# EAGLE board OLM-env-sensor (EAGLE 6.4)
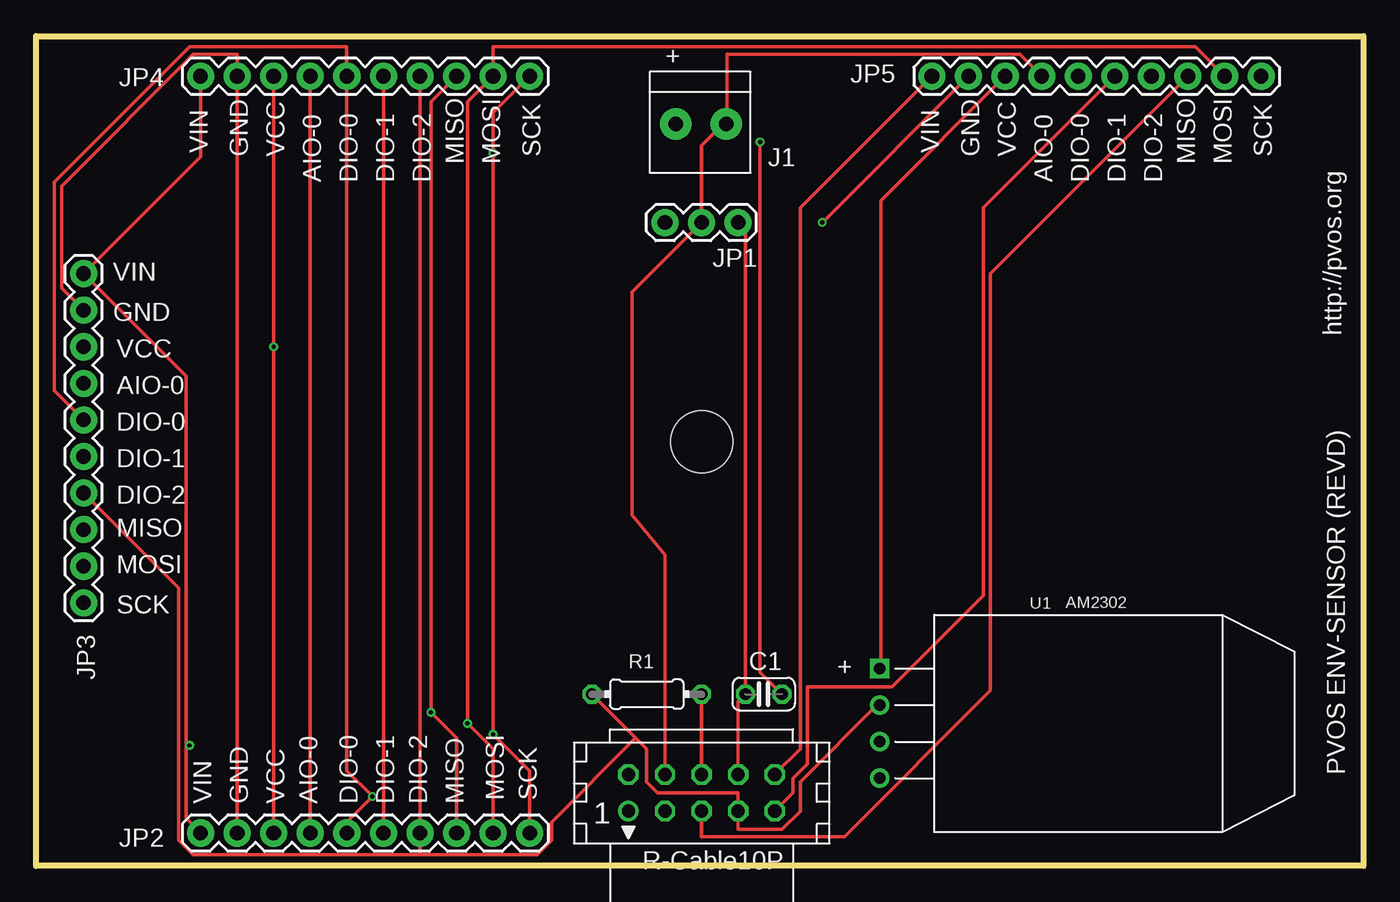
[diagram p0: board, top side]
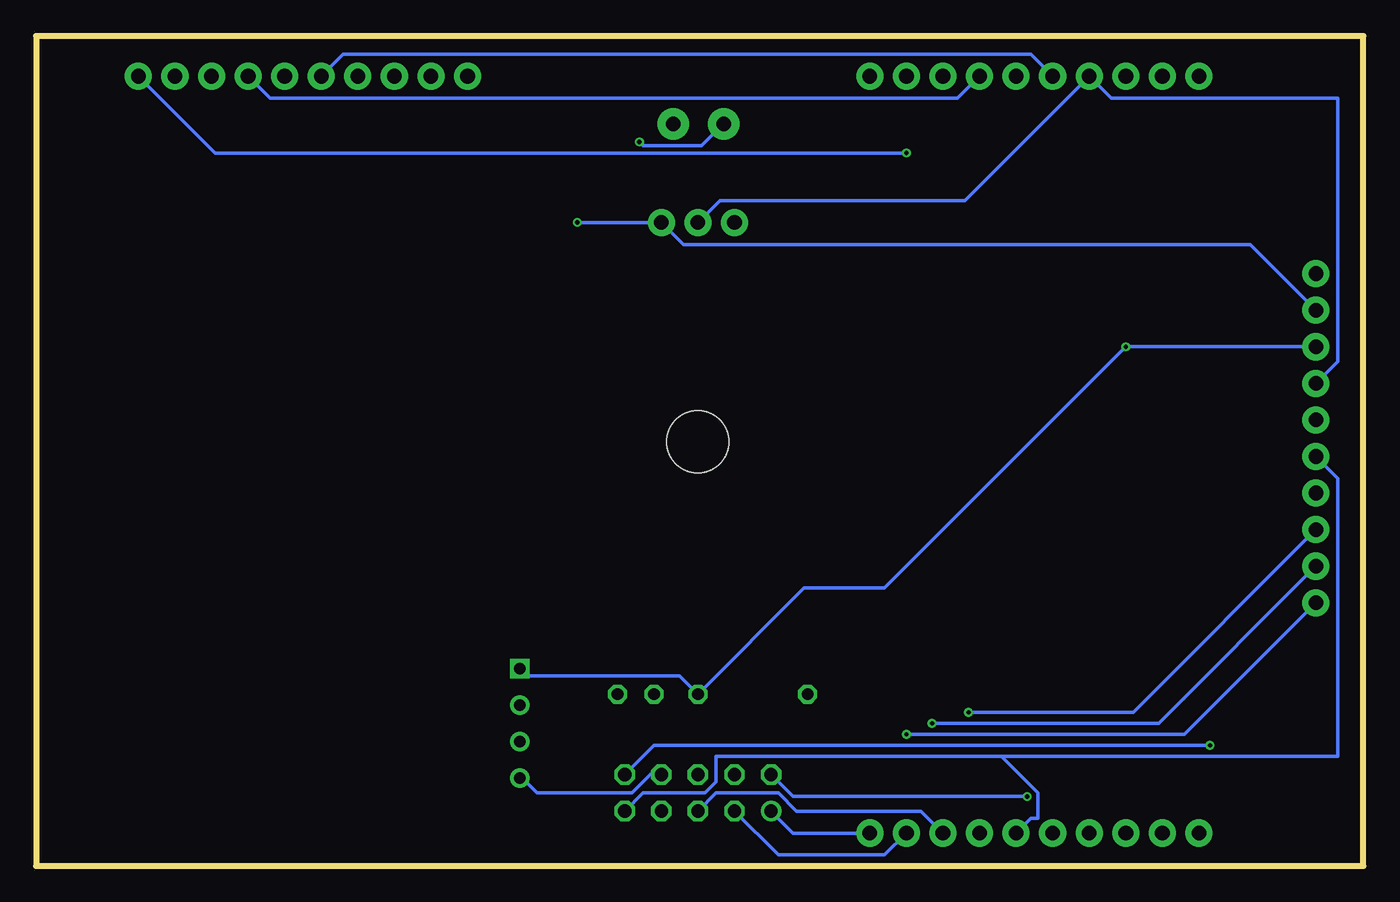
[diagram p1: board, bottom side, seen from below]

Size 92.2 x 57.66 mm. Coordinates in mm from the lower left corner, seen from the top.
Outline: 0,0 0,57.66 92.2,57.66 92.2,0 0,0
Copper layers (1*16): Top 0.035mm / dielectric 1.5mm / Bottom 0.035mm
Design rules "Fusion_eagle_rule_v1.1": minimum track width 6mil, minimum drill 12mil, track to track 6mil, track to pad 6mil, pad to pad 6mil, via to via 6mil, smd to smd 0mil, copper to edge 10mil, drill to drill 10mil, minimum pad ring 10mil, minimum via ring 6mil, stop-mask expansion 2mil, vias tented up to drill 100mil, thermal gap 10mil
Net classes: 0 default: width 0.254 mm, drill 0.254 mm, clearance 0.254 mm; 1 power: width 0.813 mm, drill 0.254 mm, clearance 0.254 mm
Holes 4.32 mm at 46.23,29.46

## Footprints (pad centres in the part's own frame; a part is rotated, then mirrored left to right if it is on the bottom)
C025-024X044 = drill 0.813 octagon: 1 -1.27,0; 2 1.27,0
CON10L = drill 0.914: 1 5.08,1.27 | drill 0.914 octagon: 2 5.08,-1.27; 3 2.54,1.27; 4 2.54,-1.27; 5 0,1.27; 6 0,-1.27; 7 -2.54,1.27; 8 -2.54,-1.27; 9 -5.08,1.27; 10 -5.08,-1.27
1X2-3.5MM = drill 1 pad 2.184: 1 1.8,0; 2 -1.7,0
1X03 = drill 1.016 pad 1.88: 1 0,0; 2 2.54,0; 3 5.08,0
1X10 = drill 1.016 pad 1.88: 1 0,0; 2 2.54,0; 3 5.08,0; 4 7.62,0; 5 10.16,0; 6 12.7,0; 7 15.24,0; 8 17.78,0; 9 20.32,0; 10 22.86,0
0204/7 = drill 0.813 octagon: 1 -3.81,0; 2 3.81,0
AM2302 = drill 0.8 pad 1.35 square: P$1 -3.81,-13.8 | drill 0.8 pad 1.35: P$2 -1.27,-13.8; P$3 1.27,-13.8; P$4 3.81,-13.8

## Placement (x,y rotation side)
C1  0.1µ  [C025-024X044]  50.55,11.94 180 top
CON1  [CON10L]  46.23,5.08 180 top
J1  1X2-3.5MM  [1X2-3.5MM]  46.23,51.56 180 top
JP1  [1X03]  48.77,44.7 180 top
JP2  M10"  [1X10]  11.43,2.29 0 top
JP3  M10"  [1X10]  3.3,41.15 270 top
JP4  M10"  [1X10]  11.43,54.86 0 top
JP5  M10"  [1X10]  62.23,54.86 0 top
R1  10k  [0204/7]  42.42,11.94 180 top
U1  AM2302  [AM2302]  72.39,9.91 270 top

## Library data of the parts
C1 = resistor
CON1 = con-harting; OC_FARNELL: unknown; OC_NEWARK: unknown
J1 = adafruit
JP1-JP5 = SparkFun-Connectors
R1 = rcl
U1 = sensor

## Nets
3.3V: C1.1 J1.1
AIO-0: CON1.4 J1.2 JP1.2 JP2.4 JP3.4 JP4.4 JP5.4
DIO-0: CON1.2 JP2.5 JP3.5 JP4.5 JP5.5
DIO-1: CON1.9 JP2.6 JP3.6 JP4.6 JP5.6
DIO-2: CON1.7 JP2.7 JP3.7 JP4.7 JP5.7 R1.2 U1.P$2
GND: C1.2 CON1.8 JP1.1 JP2.2 JP3.2 JP4.2 JP5.2 U1.P$4
MISO: CON1.5 JP2.8 JP3.8 JP4.8 JP5.8
MOSI: CON1.3 JP2.9 JP3.9 JP4.9 JP5.9
SCK: CON1.1 JP2.10 JP3.10 JP4.10 JP5.10
VCC: CON1.6 JP2.3 JP3.3 JP4.3 JP5.3 R1.1 U1.P$1
VIN: CON1.10 JP2.1 JP3.1 JP4.1 JP5.1

## Tracks (layer width: path | path; a pad name or v marks a point on that pad's centre or on a via)
3.3V  (via drill 0.3)
  Top 0.254: C1.1 50.29,13.46 v50.29,50.29
  Bottom 0.254: v50.29,50.29 50.04,50.04 45.97,50.04 44.45,51.56 J1.1
AIO-0
  Top 0.254: JP4.4 JP2.4 | JP5.4 68.33,56.39 48.01,56.39 48.01,51.56 J1.2 47.75,51.56 46.23,50.04 JP1.2 41.4,39.88 41.4,24.38 43.69,21.59 CON1.4
  Bottom 0.254: JP3.4 1.78,35.05 1.78,53.34 17.53,53.34 JP4.4 27.69,46.23 44.7,46.23 JP1.2
DIO-0  (via drill 0.3)
  Top 0.254: JP2.5 21.59,3.05 v23.37,4.83 21.59,6.6 JP4.5 21.59,56.9 10.67,56.9 1.27,47.5 1.27,33.02 JP3.5
  Bottom 0.254: CON1.2 39.62,4.83 v23.37,4.83 | JP5.5 70.87,56.39 23.11,56.39 JP4.5
DIO-1
  Top 0.254: JP2.6 JP4.6 | JP5.6 65.79,45.72 65.79,18.8 59.44,12.45 53.59,12.45 53.59,7.11 52.58,6.1 52.58,5.08 CON1.9
  Bottom 0.254: CON1.9 50.04,5.08 45.72,5.08 44.96,5.84 44.96,7.62 25.15,7.62 | 25.15,7.62 22.61,5.08 22.61,3.3 23.11,3.3 JP2.6 | JP3.6 1.78,26.92 1.78,7.62 25.15,7.62
DIO-2
  Top 0.254: 41.66,8.89 42.42,8.13 42.42,5.84 43.18,5.08 48.77,5.08 CON1.7 48.77,2.54 51.82,2.54 53.09,3.81 53.09,5.84 58.42,11.18 U1.P$2 | 41.66,8.89 R1.2 | JP3.7 9.91,19.3 9.91,1.78 10.92,0.76 26.67,0.76 | 26.67,0.76 JP2.7 JP4.7 | 41.66,8.89 35.81,3.05 35.81,1.78 34.8,0.76 26.67,0.76
  Bottom 0.254: JP5.7 75.95,53.34 28.19,53.34 JP4.7
GND  (via drill 0.3)
  Top 0.254: JP2.2 JP4.2 13.97,56.39 10.92,56.39 1.78,47.24 1.78,40.13 JP3.2 | CON1.8 48.77,11.43 C1.2 49.28,44.2 JP1.1 | v54.61,44.7 JP5.2
  Bottom 0.254: CON1.8 49.53,6.35 50.8,5.08 57.4,5.08 58.42,6.1 U1.P$4 | v54.61,44.7 JP1.1 47.24,43.18 7.87,43.18 JP3.2
MISO  (via drill 0.3)
  Top 0.254: JP2.8 29.21,8.89 v27.43,10.67 27.43,53.09 JP4.8 | JP5.8 66.29,41.15 66.29,12.19 56.13,2.03 46.23,2.03 CON1.5
  Bottom 0.254: CON1.5 44.96,5.08 40.64,5.08 39.37,3.81 30.73,3.81 JP2.8 | JP3.8 16,10.67 v27.43,10.67
MOSI  (via drill 0.3)
  Top 0.254: JP2.9 31.75,8.13 v29.97,9.91 29.97,53.09 JP4.9 31.75,56.9 80.52,56.9 JP5.9
  Bottom 0.254: CON1.3 40.64,0.76 33.27,0.76 JP2.9 | JP3.9 14.22,9.91 v29.97,9.91
SCK  (via drill 0.3)
  Top 0.254: JP2.10 34.29,6.6 v31.75,9.14 v31.75,49.53 31.75,52.32 JP4.10
  Bottom 0.254: CON1.1 39.62,2.29 JP2.10 | JP3.10 12.45,9.14 v31.75,9.14 | JP5.10 79.76,49.53 v31.75,49.53
VCC  (via drill 0.3)
  Top 0.254: JP4.3 v16.51,36.07 JP2.3 | CON1.6 R1.1 | JP5.3 58.67,46.23 58.67,13.72 U1.P$1
  Bottom 0.254: JP3.3 v16.51,36.07 33.27,19.3 38.86,19.3 R1.1 47.5,13.21 57.91,13.21 58.42,13.72 U1.P$1
VIN  (via drill 0.3)
  Top 0.254: CON1.10 53.09,8.13 53.09,45.72 JP5.1 | JP4.1 11.43,49.28 JP3.1 10.41,34.04 10.41,8.38 | JP2.1 10.41,3.3 10.41,8.38 | 10.41,8.38 v10.67,8.38
  Bottom 0.254: CON1.10 49.28,8.38 v10.67,8.38

## Text on the board
tPlace: + | VIN | VIN | GND | VCC | MISO | MOSI | SCK | GND | VCC | MISO | MOSI | SCK | AIO-0 | DIO-0 | DIO-1 | DIO-2 | AIO-0 | DIO-0 | DIO-1 | DIO-2 | VIN | GND | http://pvos.org | VCC | AIO-0 | DIO-0 | DIO-1 | DIO-2 | MISO | MOSI | SCK | + | PVOS ENV-SENSOR (REVD) | MOSI | SCK | VIN | GND | VCC | AIO-0 | DIO-0 | DIO-1 | DIO-2 | MISO